# EAGLE board ir_remote_v3 (EAGLE 9.6.2)
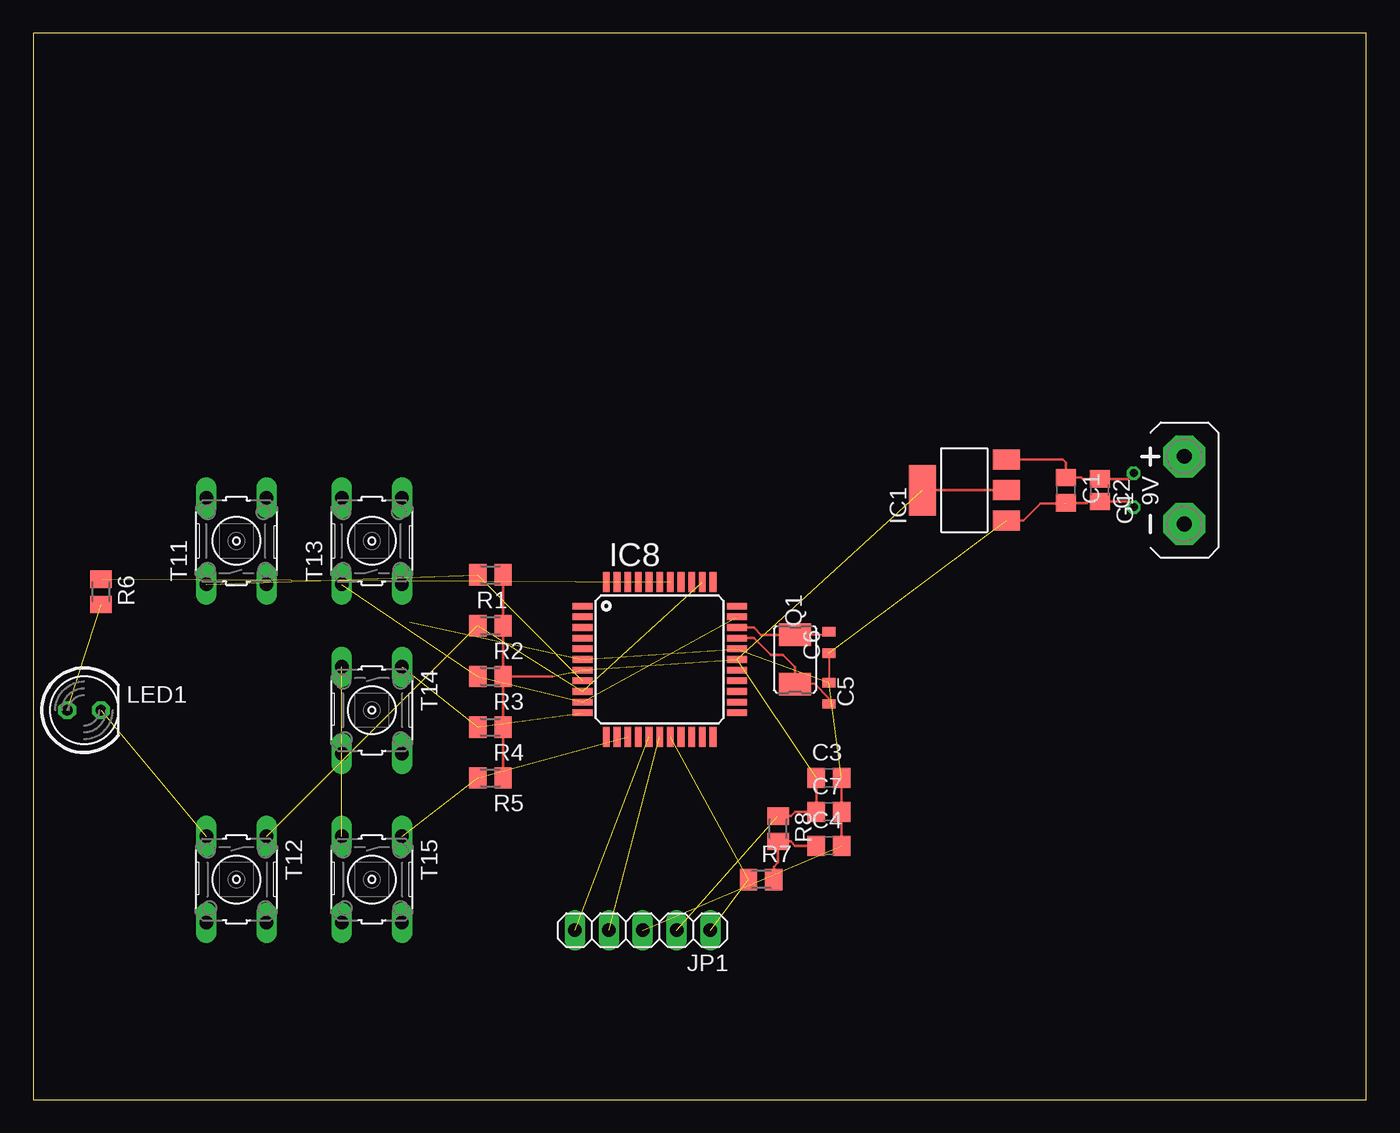
[diagram p0: board, top side]
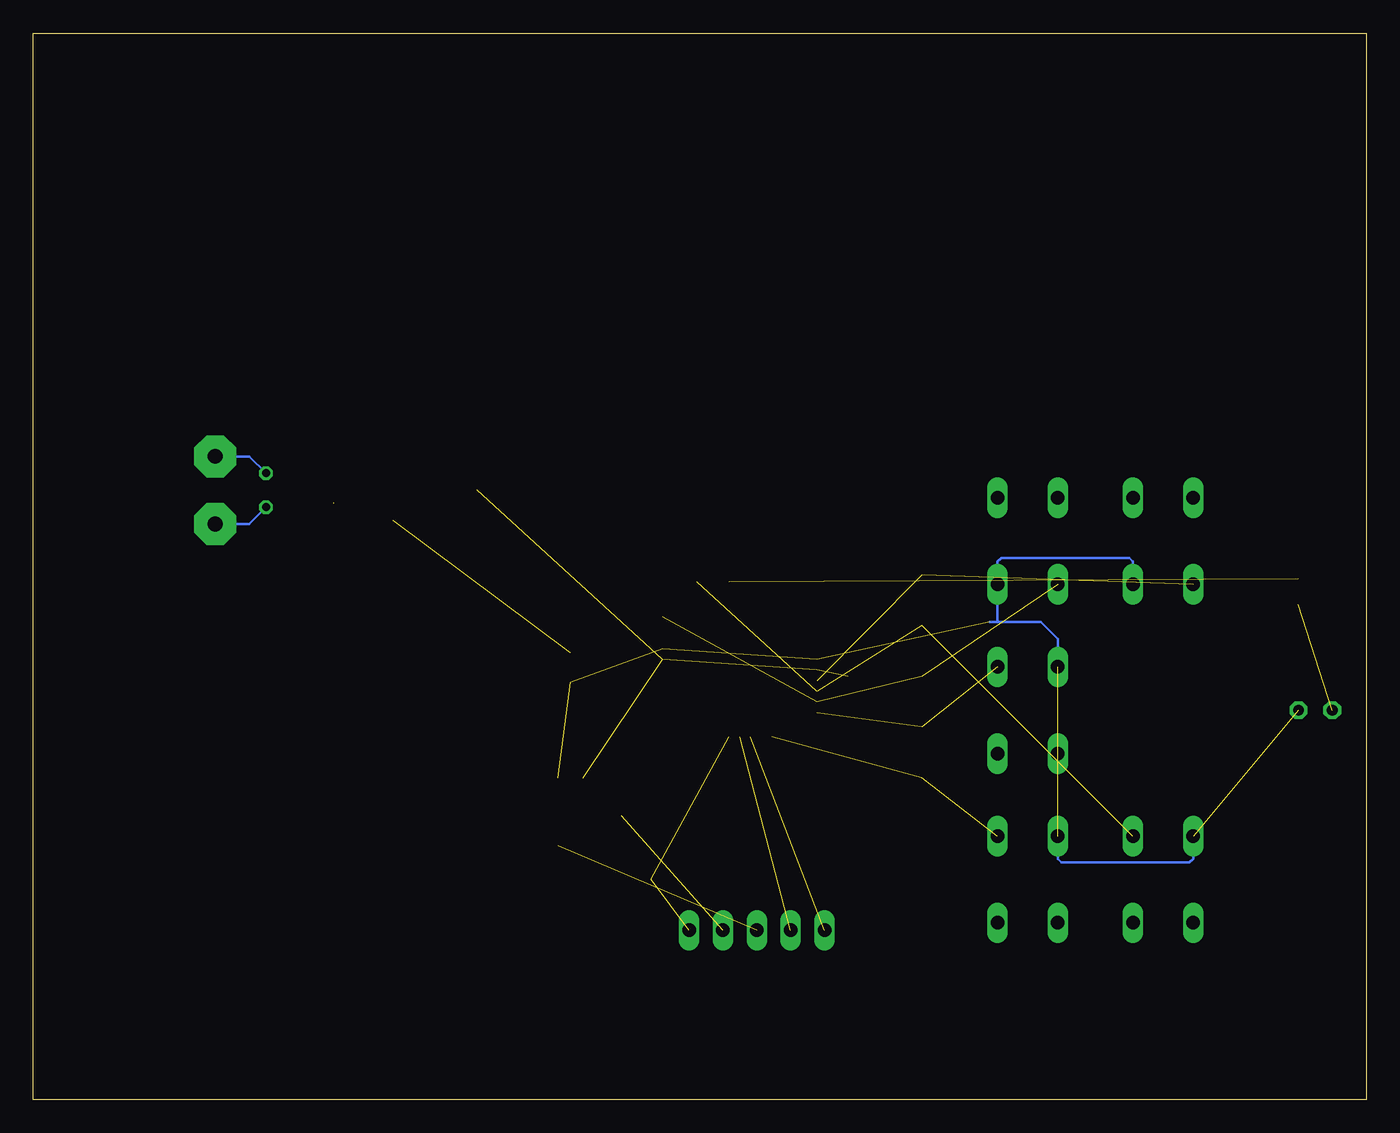
[diagram p1: board, bottom side, seen from below]

Size 100 x 80 mm. Coordinates in mm from the lower left corner, seen from the top.
Outline: 0,0 100,0 100,80 0,80 0,0
Copper layers (1*16): Top 0.035mm / dielectric 1.5mm / Bottom 0.035mm
Design rules "default": minimum track width 6mil, minimum drill 0.35mm, track to track 6mil, track to pad 6mil, pad to pad 6mil, via to via 6mil, smd to smd 6mil, copper to edge 40mil, drill to drill 6mil, minimum pad ring 10mil, minimum via ring 8mil, stop-mask expansion 4mil, vias tented up to drill 0mil, thermal gap 10mil

## Footprints (pad centres in the part's own frame; a part is rotated, then mirrored left to right if it is on the bottom)
C0805 = smd 1.3 x 1.5: 1 -0.95,0; 2 0.95,0
C0805' = smd 1.3 x 1.5: 1 -0.85,0; 2 0.85,0
C0603_WE = smd 0.7 x 1: 1 -0.8,0; 2 0.8,0
AB9V = drill 1.118 pad 3.15 octagon: + 0,2.54; - 0,-2.54
SOT223 = smd 1.499 x 2.007: 1 -2.261,-3.15; 2 0.025,-3.15; 3 2.311,-3.15 | smd 3.81 x 2.007: 4 0,3.15
TQFP44 = smd 1.5 x 0.5: 1 -5.8,4; 2 -5.8,3.2; 3 -5.8,2.4; 4 -5.8,1.6; 5 -5.8,0.8; 6 -5.8,0; 7 -5.8,-0.8; 8 -5.8,-1.6; 9 -5.8,-2.4; 10 -5.8,-3.2; 11 -5.8,-4; 23 5.8,-4; 24 5.8,-3.2; 25 5.8,-2.4; 26 5.8,-1.6; 27 5.8,-0.8; 28 5.8,0; 29 5.8,0.8; 30 5.8,1.6; 31 5.8,2.4; 32 5.8,3.2; 33 5.8,4 | smd 0.5 x 1.5: 12 -4,-5.8; 13 -3.2,-5.8; 14 -2.4,-5.8; 15 -1.6,-5.8; 16 -0.8,-5.8; 17 0,-5.8; 18 0.8,-5.8; 19 1.6,-5.8; 20 2.4,-5.8; 21 3.2,-5.8; 22 4,-5.8; 34 4,5.8; 35 3.2,5.8; 36 2.4,5.8; 37 1.6,5.8; 38 0.8,5.8; 39 0,5.8; 40 -0.8,5.8; 41 -1.6,5.8; 42 -2.4,5.8; 43 -3.2,5.8; 44 -4,5.8
1X05 = drill 1.016 long: 1 -5.08,0; 2 -2.54,0; 3 0,0; 4 2.54,0; 5 5.08,0
LED5MM = drill 0.813 octagon: A -1.27,0; K 1.27,0
QUARZ_HC5032/2 = smd 1.7 x 2.4: 1 -1.85,0; 2 1.85,0
M0805 = smd 1.3 x 1.6: 1 -0.95,0; 2 0.95,0
TASTER3301 = drill 1.016 long: 1 -3.251,2.261; 2 3.251,2.261; 3 -3.251,-2.261; 4 3.251,-2.261

## Placement (x,y rotation side)
C1  10u  [C0805]  77.47,45.72 270 top
C2  100n  [C0805']  80.01,45.72 270 top
C3  10u  [C0805]  59.69,24.13 0 top
C4  100n  [C0805]  59.69,19.05 0 top
C5  22p  [C0603_WE]  59.69,30.48 270 top
C6  22p  [C0603_WE]  59.69,34.29 90 top
C7  100n  [C0805]  59.69,21.59 0 top
G1  AB9V  [AB9V]  86.36,45.72 0 top
IC1  AP1117E50G  [SOT223]  69.85,45.72 90 top
IC8  [TQFP44]  46.99,33.02 0 top
JP1  [1X05]  45.72,12.7 180 top
LED1  [LED5MM]  3.81,29.21 0 top
Q1  10MHz  [QUARZ_HC5032/2]  57.15,33.02 90 top
R1  10k  [M0805]  34.29,39.37 180 top
R2  10k  [M0805]  34.29,35.56 180 top
R3  10k  [M0805]  34.29,31.75 180 top
R4  10k  [M0805]  34.29,27.94 180 top
R5  10k  [M0805]  34.29,24.13 180 top
R6  100  [M0805]  5.08,38.1 270 top
R7  470  [M0805]  54.61,16.51 0 top
R8  10k  [M0805]  55.88,20.32 270 top
T11  TASTER3301  [TASTER3301]  15.24,41.91 90 top
T12  TASTER3301  [TASTER3301]  15.24,16.51 270 top
T13  TASTER3301  [TASTER3301]  25.4,41.91 90 top
T14  TASTER3301  [TASTER3301]  25.4,29.21 270 top
T15  TASTER3301  [TASTER3301]  25.4,16.51 270 top

## Library data of the parts
C1 C3-C7 R1-R8 = rcl
C2 = rcl_416
G1 = battery
IC1 = Bernd_110428
IC8 Q1 T11-T15 = Bernd
JP1 = pinhead
LED1 = led

## Nets
+9V: C1.1 C2.1 G1.+ IC1.3
D0_LCD: IC8.27
D1_LCD: IC8.26
GND: C1.2 C2.2 C3.2 C4.2 C5.1 C6.1 C7.2 G1.- IC1.1 IC8.6 IC8.29 JP1.3 LED1.K T11.3 T12.3 T13.3 T14.3 T15.3
MCLR: IC8.18 JP1.1 R7.1
N$19: LED1.A R6.2
N$24: C4.1 R7.2 R8.2
N$47: C5.2 IC8.30 Q1.1
N$48: C6.2 IC8.31 Q1.2
RB0: IC8.8 R1.2 T11.1
RB1: IC8.9 IC8.35 R2.2 T12.1
RB2: IC8.10 IC8.32 R3.2 T13.1
RB3: IC8.11 R4.2 T14.1
RB4: IC8.14 R5.2 T15.1
RB5: IC8.15
RB6: IC8.16 JP1.5
RB7: IC8.17 JP1.4
RD0_LED: IC8.38 R6.1
RDS_INT: IC8.36
VCC: C3.1 C7.1 IC1.2 IC1.4 IC8.7 IC8.28 JP1.2 R1.1 R2.1 R3.1 R4.1 R5.1 R8.1

## Tracks (layer width: path | path; a pad name or v marks a point on that pad's centre or on a via)
+9V  (via drill 0.6)
  Top 0.2: IC1.3 77.24,48.03 77.47,47.8 C1.1 78.64,46.67 78.74,46.57 C2.1 82.13,46.57 v82.55,46.99
  Bottom 0.2: v82.55,46.99 83.82,48.26 G1.+
GND  (via drill 0.6)  (9 unrouted)
  Top 0.152: C6.1 C5.1
  Top 0.2: 77.43,44.73 75.54,44.73 74.27,43.46 IC1.1 | v82.55,44.45 82.13,44.87 C2.2 79.16,44.87 79.06,44.77 C1.2 | C3.2 C7.2 C4.2
  Bottom 0.2: v82.55,44.45 83.82,43.18 G1.- | T15.3 23.14,18.06 22.86,17.78 13.26,17.78 12.98,18.06 T12.3 | T11.3 17.5,40.36 17.78,40.64 27.38,40.64 27.66,40.36 T13.3 27.66,35.84 | T14.3 23.14,34.57 24.41,35.84 27.66,35.84 | 27.66,35.84 28.22,35.84
MCLR  (2 unrouted)
N$19  (1 unrouted)
N$24
  Top 0.2: C4.1 57.15,19.05 56.83,19.37 R8.2 55.88,17.78 55.56,17.46 R7.2
N$47
  Top 0.152: C5.2 59.69,30.11 58.63,31.17 Q1.1
  Top 0.2: Q1.1 57.15,32.44 56.24,33.35 55.33,33.35 54.06,34.62 IC8.30
N$48
  Top 0.152: C6.2 59.47,34.87 Q1.2
  Top 0.2: Q1.2 54.61,34.87 54.06,35.42 IC8.31
RB0  (2 unrouted)
RB1  (3 unrouted)
RB2  (3 unrouted)
RB3  (2 unrouted)
RB4  (2 unrouted)
RB6  (1 unrouted)
RB7  (1 unrouted)
RD0_LED  (1 unrouted)
VCC  (5 unrouted)
  Top 0.2: IC1.4 66.73,45.74 IC1.2 | C3.1 C7.1 57.15,21.59 56.83,21.27 R8.1 | R5.1 R4.1 R3.1 | R1.1 R2.1 R3.1 | R3.1 38.9,31.75